# Altium PCB SiLPA_HE.PcbDoc (part 4 of 10)
Units mm, origin at the board's own origin, x right, y up, seen from the top; angles counter-clockwise.
Board outline 222.47 x 100.01 mm, 4 copper layers (Top Layer, Int1 (GND), Int2 (PWR), Bottom Layer), stack 1.508 mm thick; 661 components, 355 nets, 1925 pads, 1744 vias.
Unrouted connection lines stored in the file: 360.
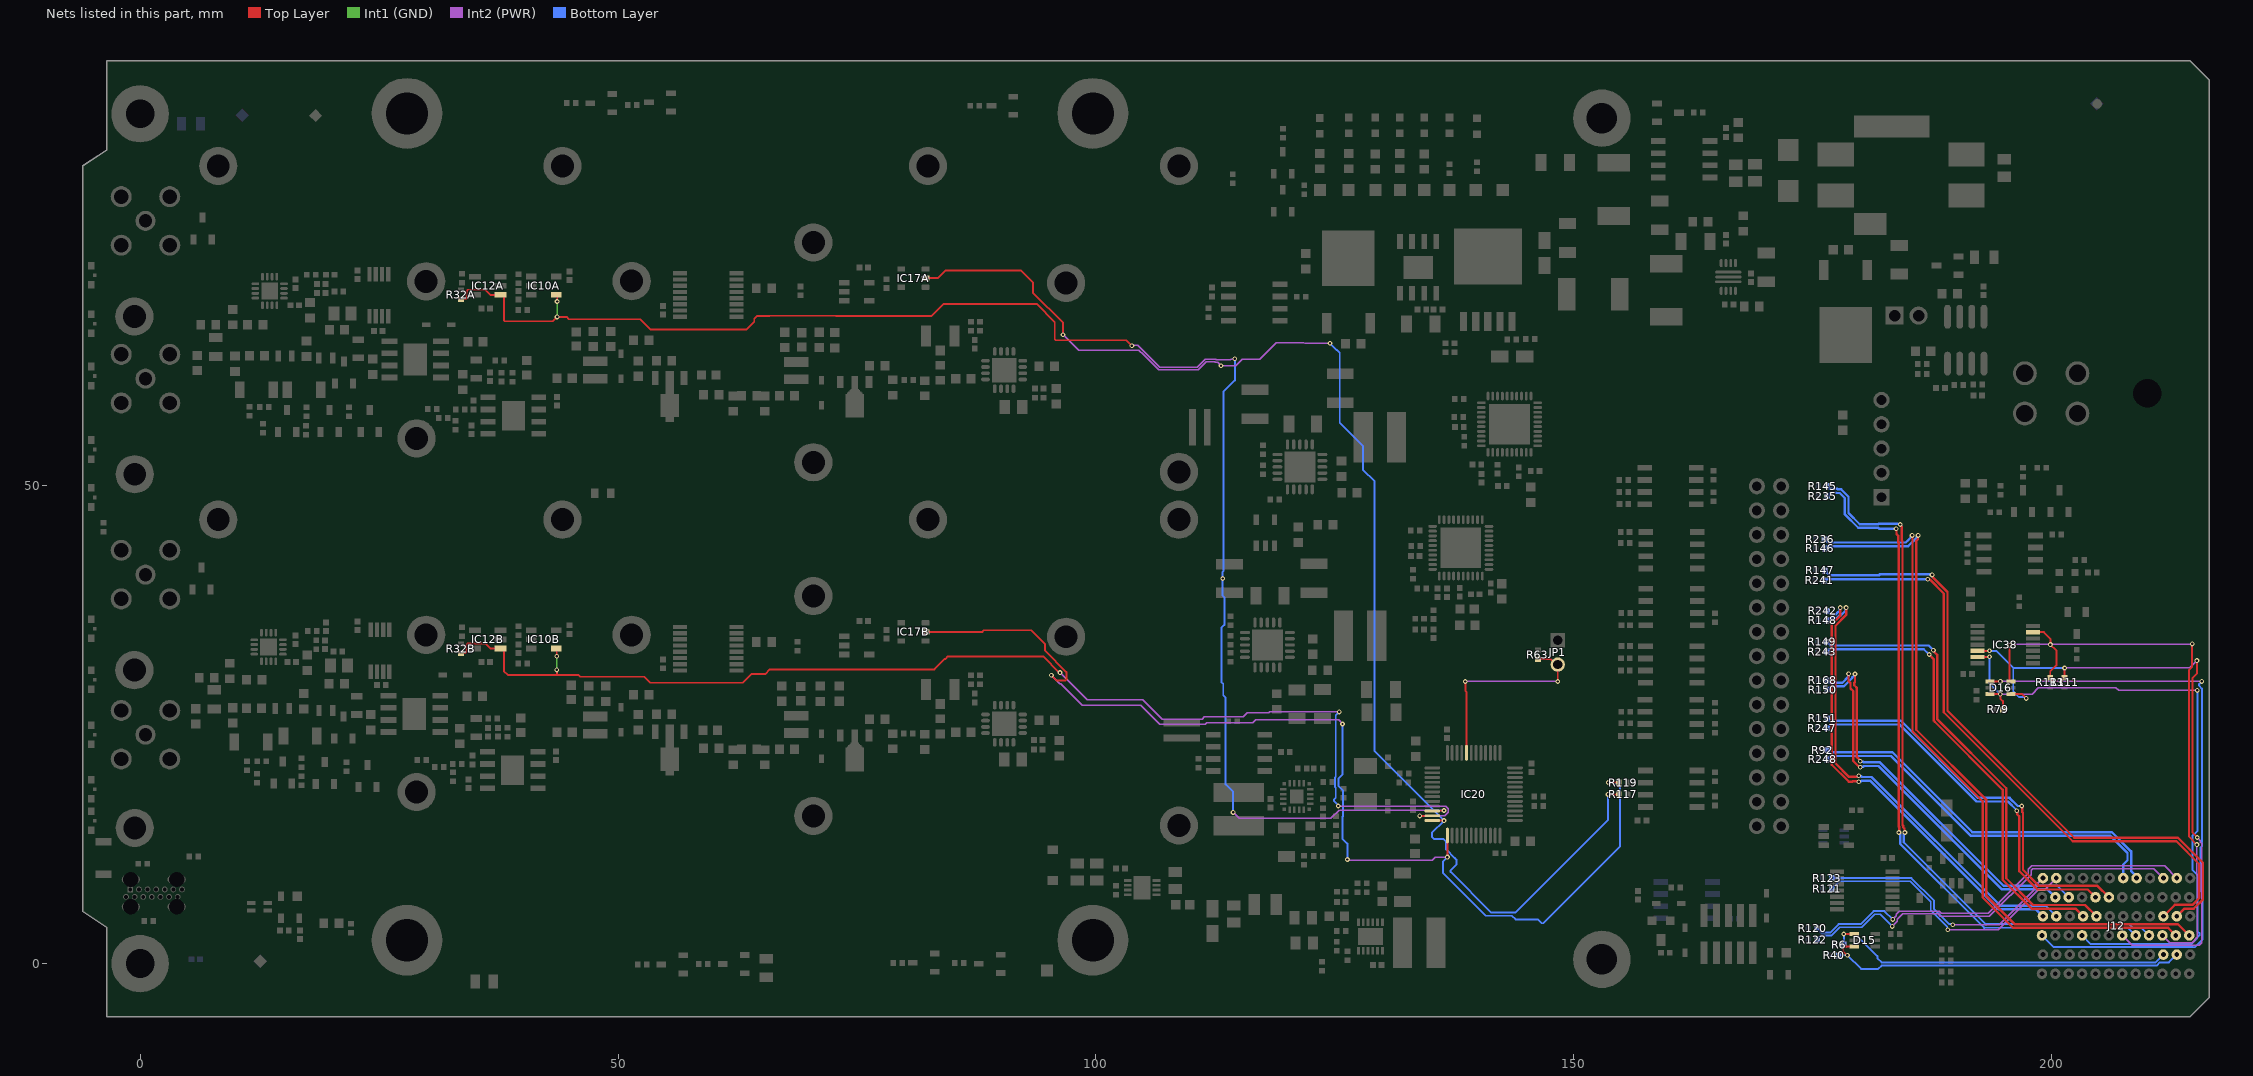
[diagram p5: the nets of this part, all layers, seen from the top]

## Part data (continued)
C18A C18B C20 C21 C22: library part CC0805_10UF_25V_10%_X5R, "Non-polarised capacitor", Case=0805, Manufacturer=GENERIC, Manufacturer1 ComponentHeight=0.95mm, Manufacturer1 Example=MURATA, Manufacturer1 Part Number=GRM219R61E106KA12D, Tolerance=±10%, Voltage=25V, Author="CERN DEM JLC", Component Type=Standard, CreateDate=25.10.2012, HelpURL=\\cern.ch\dfs\Applications\Altium\Datasheets\CC0805_X5R_MURATA_GRM.pdf, LatestRevisionDate=06.09.2016, Manufacturer Part Number=CC0805_10UF_25V_10%_X5R, Mounted=Yes, Part Description="SMD Multilayer Chip Ceramic Capacitor", Part Number=CC0805_10UF_25V_10%_X5R, Pin Count=2, Sense=No, SMD=Yes, Socket=No, Status=Preferred, TC=X5R
C23 C25 C26 C75 C76 C83 C85 C86 C99 C166: library part CC0402_1UF_16V_10%_X5R, "Non-polarised capacitor", Case=0402, Manufacturer=GENERIC, Manufacturer1 ComponentHeight=0.55mm, Manufacturer1 Example=TDK, Manufacturer1 Part Number=C1005X5R1C105KT, Tolerance=±10%, Voltage=16V, Author="CERN DEM JLC", Component Type=Standard, HelpURL=\\cern.ch\dfs\Applications\Altium\Datasheets\CC0402_X5R_TDK_C.pdf, Manufacturer Part Number=CC0402_1UF_16V_10%_X5R, Mounted=Yes, Part Description="SMD Multilayer Chip Ceramic Capacitor", Part Number=CC0402_1UF_16V_10%_X5R, Pin Count=2, Sense=No, SMD=Yes, Socket=No, Status=Preferred, TC=X5R
  C23 C25 C26 C75 C76 C83 C85 C86 C166: CreateDate=25.10.2012, LatestRevisionDate=25.10.2012
  C99: CreateDate=2012-10-25, LatestRevisionDate=2012-10-25
C27 C31 C129: library part CTE3216-18_10UF_16V_20%_AVX_TCJ, "Polarised capacitor", Case=A, Manufacturer=AVX, Manufacturer Part Number=TCJA106M016R0200, Tolerance=±20%, Voltage=16V, Author="CERN DEM JLC", Component Type=Standard, ComponentHeight=1.8mm, CreateDate=29.03.2012, HelpURL=\\cern.ch\dfs\Applications\Altium\Datasheets\CTE_AVX_TCJ.pdf, LatestRevisionDate=29.03.2012, Mounted=Yes, Part Description="ESR 0R200 Tantalum Solid Electrolytic Chip Capacitor with Conductive Polymer Electrode", Part Number=CTE3216-18_10UF_16V_20%_AVX_TCJ, Pin Count=2, Sense=No, SMD=Yes, Socket=No, Status=Preferred
C28 C30 C33 C35 C37 C38 C114 C123 C137 C138 C139 C140 C141: library part CC1206_22UF_35V_20%_JB_TDK_C3216JB1V226M160AC, "Non-polarised capacitor", Case=1206, Manufacturer=TDK, Manufacturer Part Number=C3216JB1V226M160AC, Tolerance=±20%, Voltage=35V, Author="CERN DEM JLC", Component Type=Standard, ComponentHeight=1.8mm, CreateDate=13.07.2017, HelpURL=\\cern.ch\dfs\Applications\Altium\Datasheets\CC1206_TDK_C3216JB1V226M160AC.pdf, LatestRevisionDate=13.07.2017, Mounted=Yes, Part Description="SMD Multilayer Chip Ceramic Capacitor", Part Number=CC1206_22UF_35V_20%_JB_TDK_C3216JB1V226M160AC, Pin Count=2, Sense=No, SMD=Yes, Socket=No, Status=None, TC=JB(±10%)
C39 C40 C102 C147: library part CC1210_10UF_50V_10%_X7R_YUDEN_UMK325AB7106KMHP, "Non-polarised capacitor", Case=1210, Manufacturer="TAIYO YUDEN", Manufacturer Part Number=UMK325AB7106KMHP, Tolerance=±10%, Voltage=50V, Author="CERN DEM JLC", Component Type=Standard, ComponentHeight=2.8mm, CreateDate=30.11.2016, HelpURL=\\cern.ch\dfs\Applications\Altium\Datasheets\CC1210_TAIYO-YUDEN_UMK325AB7106KMHP.pdf, LatestRevisionDate=30.12.2015, Mounted=Yes, Part Description="SMD Multilayer Chip Ceramic Capacitor (High Dielectric Type) for Automotive / Industrial Applications", Part Number=CC1210_10UF_50V_10%_X7R_YUDEN_UMK325AB7106KMHP, Pin Count=2, Sense=No, SMD=Yes, Socket=No, Status="Not Recommended", TC=X7R
C41A C41B: library part CC0603_470PF_50V_1%_NP0, "Non-polarised capacitor", Case=0603, Manufacturer=GENERIC, Manufacturer1 ComponentHeight=0.87mm, Manufacturer1 Example=Multicomp, Manufacturer1 Part Number=MCMT18N471F500CT, Tolerance=±1%, Voltage=50V, Author=GK, Component Type=Standard, CreateDate=03.12.2007, HelpURL=\\cern.ch\dfs\Applications\Altium\Datasheets\CC0603_NP0_PHYCOMP.pdf, LatestRevisionDate=03.12.2007, Manufacturer Part Number=CC0603_470PF_50V_1%_NP0, Mounted=Yes, Part Description="SMD Multilayer Chip Ceramic Capacitor", Part Number=CC0603_470PF_50V_1%_NP0, Pin Count=2, Sense=No, SMD=Yes, Socket=No, Status=Preferred, TC=C0G/NP0
C43A C43B C47A C47B C55A C55B C60A C60B C103 C120A C120B C121A C121B: library part CC0402_100NF_50V_10%_X7R, "Non-polarised capacitor", Case=0402, Manufacturer=GENERIC, Manufacturer1 ComponentHeight=0.55mm, Manufacturer1 Example=MURATA, Manufacturer1 Part Number=GRM155R71H104KE14D, Tolerance=±10%, Voltage=50V, Author="CERN DEM MR", Component Type=Standard, HelpURL=\\cern.ch\dfs\Applications\Altium\Datasheets\CC0402_MURATA_GRM155R71H104KE14D.pdf, Manufacturer Part Number=CC0402_100NF_50V_10%_X7R, Mounted=Yes, Part Description="SMD Multilayer Chip Ceramic Capacitor", Part Number=CC0402_100NF_50V_10%_X7R, Pin Count=2, Sense=No, SMD=Yes, Socket=No, Status=None, TC=X7R
  C43A C43B C47A C47B C55A C55B C60A C60B: CreateDate=30/06/2017, LatestRevisionDate=30/06/2017
  C103 C120A C120B C121A C121B: CreateDate=30.06.2017, LatestRevisionDate=30.06.2017
C45A C45B: library part CC0402_680PF_50V_5%_X7R, "Non-polarised capacitor", Case=0402, Manufacturer=GENERIC, Manufacturer1 ComponentHeight=0.55mm, Manufacturer1 Example=PHYCOMP, Manufacturer1 Part Number=223858715621, Manufacturer Part Number=CC0402_680PF_50V_10%_X7R, Tolerance=±10%, Voltage=50V, Author="CERN DEM JLC", Component Type=Standard, CreateDate=03.12.2007, HelpURL=\\cern.ch\dfs\Applications\Altium\Datasheets\CC0402_NP0_PHYCOMP.pdf, LatestRevisionDate=03.12.2007, Mounted=Yes, Part Description="SMD Multilayer Chip Ceramic Capacitor", Part Number=CC0402_680PF_50V_5%_X7R, Pin Count=2, Sense=No, SMD=Yes, Socket=No, Status="Not Recommended", TC=X7R
C48A C48B: library part CC0805_470NF_50V_10%_X7R, "Non-polarised capacitor", Case=0805, Manufacturer=GENERIC, Manufacturer1 ComponentHeight=1.1mm, Manufacturer1 Example=KEMET, Manufacturer1 Part Number=C0805C474K5RACTU, Tolerance=±10%, Voltage=50V, Author="CERN DEM JLC", Component Type=Standard, CreateDate=04.12.2013, HelpURL=\\cern.ch\dfs\Applications\Altium\Datasheets\CC0805_X7R_KEMET.pdf, LatestRevisionDate=04.12.2013, Manufacturer Part Number=CC0805_470NF_50V_10%_X7R, Mounted=Yes, Part Description="SMD Multilayer Chip Ceramic Capacitor", Part Number=CC0805_470NF_50V_10%_X7R, Pin Count=2, Sense=No, SMD=Yes, Socket=No, Status=Preferred, TC=X7R
C49A C49B: library part CC0603_3.3NF_50V_5%_C0G, "Non-polarised capacitor", Case=0603, Manufacturer=GENERIC, Manufacturer1 ComponentHeight=0.9mm, Manufacturer1 Example=TDK, Manufacturer1 Part Number=C1608C0G1H332J080AA, Tolerance=±5%, Voltage=50V, Author="CERN DEM MR", Component Type=Standard, CreateDate=02.11.2016, HelpURL=\\cern.ch\dfs\Applications\Altium\Datasheets\CC0603_C0G_TDK_C.pdf, LatestRevisionDate=02.11.2016, Manufacturer Part Number=CC0603_3.3NF_50V_5%_C0G, Mounted=Yes, Part Description="SMD Multilayer Chip Ceramic Capacitor", Part Number=CC0603_3.3NF_50V_5%_C0G, Pin Count=2, Sense=No, SMD=Yes, Socket=No, Status=Preferred, TC=C0G/NP0
C50A C50B: library part CC0603_270PF_50V_1%_NP0, "Non-polarised capacitor", Case=0603, Manufacturer=GENERIC, Manufacturer1 ComponentHeight=0.87mm, Manufacturer1 Example=Kemet, Manufacturer1 Part Number=C0603C271F5GACTU, Tolerance=±1%, Voltage=50V, Author=GK, Component Type=Standard, CreateDate=03.12.2007, HelpURL=\\cern.ch\dfs\Applications\Altium\Datasheets\CC0603_NP0_PHYCOMP.pdf, LatestRevisionDate=03.12.2007, Manufacturer Part Number=CC0603_270PF_50V_1%_NP0, Mounted=Yes, Part Description="SMD Multilayer Chip Ceramic Capacitor", Part Number=CC0603_270PF_50V_1%_NP0, Pin Count=2, Sense=No, SMD=Yes, Socket=No, Status=Preferred, TC=C0G/NP0
C53A C53B: library part CC0402_10NF_25V_10%_X7R, "Non-polarised capacitor", Case=0402, Manufacturer=GENERIC, Manufacturer1 ComponentHeight=0.55mm, Manufacturer1 Example=TDK, Manufacturer1 Part Number=C1005X7R1E103KT, Tolerance=±10%, Voltage=25V, Author="CERN DEM JLC", Component Type=Standard, CreateDate=25.10.2012, HelpURL=\\cern.ch\dfs\Applications\Altium\Datasheets\CC0402_X7R_TDK_C.pdf, LatestRevisionDate=25.10.2012, Manufacturer Part Number=CC0402_10NF_25V_10%_X7R, Mounted=Yes, Part Description="SMD Multilayer Chip Ceramic Capacitor", Part Number=CC0402_10NF_25V_10%_X7R, Pin Count=2, Sense=No, SMD=Yes, Socket=No, Status=Preferred, TC=X7R
C54A C54B C68 C87 C91 C101 C104: library part CC0603_1UF_25V_10%_X7R, "Non-polarised capacitor", Case=0603, Manufacturer=GENERIC, Manufacturer1 ComponentHeight=0.9mm, Manufacturer1 Example=MURATA, Manufacturer1 Part Number=GRM188R71E105KA12D, Tolerance=±10%, Voltage=25V, Author="CERN DEM JLC", Component Type=Standard, CreateDate=18.01.2011, HelpURL=\\cern.ch\dfs\Applications\Altium\Datasheets\CC0603_X7R_MURATA.pdf, LatestRevisionDate=18.01.2011, Manufacturer Part Number=CC0603_1UF_25V_10%_X7R, Mounted=Yes, Part Description="SMD Multilayer Chip Ceramic Capacitor", Part Number=CC0603_1UF_25V_10%_X7R, Pin Count=2, Sense=No, SMD=Yes, Socket=No, Status=None, TC=X7R
C69 C78 C82 C97 C98 C112 C113 C142: library part CC0603_1UF_16V_10%_X7R, "Non-polarised capacitor", Case=0603, Manufacturer=GENERIC, Manufacturer1 ComponentHeight=0.9mm, Manufacturer1 Example="YAGEO PHYCOMP", Manufacturer1 Part Number=223878615663, Manufacturer Part Number=CC0603_1uF_16V_10%_X7R, Tolerance=±10%, Voltage=16V, Author="CERN DEM JLC", Component Type=Standard, CreateDate=03.12.2007, HelpURL=\\cern.ch\dfs\Applications\Altium\Datasheets\CC0603_X7R_PHYCOMP.pdf, LatestRevisionDate=17.04.2015, Mounted=Yes, Part Description="SMD Multilayer Chip Ceramic Capacitor", Part Number=CC0603_1UF_16V_10%_X7R, Pin Count=2, Sense=No, SMD=Yes, Socket=No, Status=None, TC=X7R
C70: library part CC0603_1UF_25V_10%_X7R_1, "Non-polarised capacitor", Case=0603, Manufacturer=GENERIC, Manufacturer1 ComponentHeight=0.9mm, Manufacturer1 Example=MURATA, Manufacturer1 Part Number=GRM188R71E105KA12D, Manufacturer Part Number=CC0603_1UF_25V_10%_X7R, Tolerance=±10%, Voltage=25V, Author="CERN DEM JLC", Component Type=Standard, CreateDate=18.01.2011, HelpURL=\\cern.ch\dfs\Applications\Altium\Datasheets\CC0603_X7R_MURATA.pdf, LatestRevisionDate=18.01.2011, Mounted=Yes, Part Description="SMD Multilayer Chip Ceramic Capacitor", Part Number=CC0603_1UF_25V_10%_X7R, Pin Count=2, Sense=No, SMD=Yes, Socket=No, Status=None, TC=X7R
C72 C73: library part CC0402_12PF_50V_5%_C0G, "Non-polarised capacitor", Case=0402, Manufacturer=GENERIC, Manufacturer1 ComponentHeight=0.55mm, Manufacturer1 Example=KEMET, Manufacturer1 Part Number=C0402C120J5GACTU, Tolerance=±5%, Voltage=50V, Author="CERN DEM JLC", Component Type=Standard, CreateDate=04.10.2016, HelpURL="\\cern.ch\dfs\Applications\Altium\Datasheets\CC0805_C0G_KEMET_(Commercial Grade).pdf", LatestRevisionDate=04.10.2016, Manufacturer Part Number=CC0402_12PF_50V_5%_C0G, Mounted=Yes, Part Description="SMD Multilayer Chip Ceramic Capacitor", Part Number=CC0402_12PF_50V_5%_C0G, Pin Count=2, Sense=No, SMD=Yes, Socket=No, Status=Preferred, TC=C0G/NP0
C74: library part CC0402_100NF_16V_10%_X7R, "Non-polarised capacitor", Case=0402, Manufacturer=GENERIC, Manufacturer1 ComponentHeight=0.55mm, Manufacturer1 Example=MURATA, Manufacturer1 Part Number=GRM155R71C104KA88D, Tolerance=±10%, Voltage=16V, Author="CERN DEM JLC", Component Type=Standard, CreateDate=05.12.2013, HelpURL=\\cern.ch\dfs\Applications\Altium\Datasheets\CC0402_X7R_MURATA_GRM.pdf, LatestRevisionDate=03.12.2007, Manufacturer Part Number=CC0402_100NF_16V_10%_X7R, Mounted=Yes, Part Description="SMD Multilayer Chip Ceramic Capacitor", Part Number=CC0402_100NF_16V_10%_X7R, Pin Count=2, Sense=No, SMD=Yes, Socket=No, Status="Not Recommended", TC=X7R
C77: library part CTE3216-18_4.7UF_10V_10%_AVX_TPSA475K010T1400, "Polarised capacitor", Case=A, Manufacturer=AVX, Manufacturer Part Number=TPSA475K010T1400, Tolerance=±10%, Voltage=10V, Author="CERN DEM JLC", Component Type=Standard, ComponentHeight=1.8mm, CreateDate=23.01.2018, HelpURL=\\cern.ch\dfs\Applications\Altium\Datasheets\CTE-LESR_AVX_TPS-AUTO.pdf, LatestRevisionDate=23.01.2018, Mounted=Yes, Part Description="Low ESR 1R4 Automotive Solid Tantalum Chip Capacitor", Part Number=CTE3216-18_4.7UF_10V_10%_AVX_TPSA475K010T1400, Pin Count=2, Sense=No, SMD=Yes, Socket=No, Status=Preferred
C89 C154: library part CC0603_22UF_6.3V_20%_X5R, "Non-polarised capacitor", Case=0603, Manufacturer=GENERIC, Manufacturer1 ComponentHeight=0.9mm, Manufacturer1 Example=TDK, Manufacturer1 Part Number=C1608X5R0J226M080, Tolerance=±20%, Voltage=6.3V, Author="CERN DEM JLC", Component Type=Standard, CreateDate=16.12.2013, HelpURL=\\cern.ch\dfs\Applications\Altium\Datasheets\CC0603_X5R_TDK_C.pdf, LatestRevisionDate=03.12.2020, Manufacturer Part Number=CC0603_22UF_6.3V_20%_X5R, Mounted=Yes, Part Description="SMD Multilayer Chip Ceramic Capacitor", Part Number=CC0603_22UF_6.3V_20%_X5R, Pin Count=2, Sense=No, SMD=Yes, Socket=No, Status=None, TC=X5R
C117A C117B: library part CC0603_2.7PF_50V_0.25PF_NP0, "Non-polarised capacitor", Case=0603, Manufacturer=GENERIC, Manufacturer1 ComponentHeight=0.87mm, Manufacturer1 Example=PHYCOMP, Manufacturer1 Part Number=223886715278, Tolerance=±0.25pF, Voltage=50V, Author="CERN DEM JLC", Component Type=Standard, CreateDate=03.12.2007, HelpURL=\\cern.ch\dfs\Applications\Altium\Datasheets\CC0603_NP0_PHYCOMP.pdf, LatestRevisionDate=03.12.2007, Manufacturer Part Number=CC0603_2.7PF_50V_0.25PF_NP0, Mounted=Yes, Part Description="SMD Multilayer Chip Ceramic Capacitor", Part Number=CC0603_2.7PF_50V_0.25PF_NP0, Pin Count=2, Sense=No, SMD=Yes, Socket=No, Status=Preferred, TC=C0G/NP0
C118A C118B: library part CC0603_0.9PF_50V_0.05PF_NP0, "Non-polarised capacitor", Case=0603, Manufacturer=GENERIC, Manufacturer1 ComponentHeight=0.87mm, Manufacturer1 Example=AVX, Manufacturer1 Part Number=ML03510R9AAT2A, Tolerance=±0.05pF, Voltage=50V, Author=GK, Component Type=Standard, CreateDate=03.12.2007, HelpURL=\\cern.ch\dfs\Applications\Altium\Datasheets\CC0603_NP0_PHYCOMP.pdf, LatestRevisionDate=03.12.2007, Manufacturer Part Number=CC0603_0.9PF_50V_0.05PF_NP0, Mounted=Yes, Part Description="SMD Multilayer Chip Ceramic Capacitor", Part Number=CC0603_0.9PF_50V_0.05PF_NP0, Pin Count=2, Sense=No, SMD=Yes, Socket=No, Status=Preferred, TC=C0G/NP0
C124 C130: library part CC0603_2.2UF_16V_10%_X5R, "Non-polarised capacitor", Case=0603, Manufacturer=GENERIC, Manufacturer1 ComponentHeight=0.9mm, Manufacturer1 Example="YAGEO PHYCOMP", Manufacturer1 Part Number=CC0603KRX5R7BB225, Tolerance=±10%, Voltage=16V, Author="CERN DEM JLC", Component Type=Standard, CreateDate=28.04.2011, HelpURL=\\cern.ch\dfs\Applications\Altium\Datasheets\CC0805_X5R_PHYCOMP_HC.pdf, LatestRevisionDate=28.04.2011, Manufacturer Part Number=CC0603_2.2UF_16V_10%_X5R, Mounted=Yes, Part Description="SMD Multilayer Chip Ceramic Capacitor", Part Number=CC0603_2.2UF_16V_10%_X5R, Pin Count=2, Sense=No, SMD=Yes, Socket=No, Status=Preferred, TC=X5R
C125 C126 C127 C128 C135 C136: library part CC0805_22UF_16V_10%_X5R, "Non-polarised capacitor", Case=0805, Manufacturer=GENERIC, Manufacturer1 ComponentHeight=1.35mm, Manufacturer1 Example=TDK, Manufacturer1 Part Number=C2012X5R1C226KT, Tolerance=±10%, Voltage=16V, Author="CERN DEM JLC", Component Type=Standard, CreateDate=25.10.2012, HelpURL=\\cern.ch\dfs\Applications\Altium\Datasheets\CC0805_X5R_TDK_C.pdf, LatestRevisionDate=25.10.2012, Manufacturer Part Number=CC0805_22UF_16V_10%_X5R, Mounted=Yes, Part Description="SMD Multilayer Chip Ceramic Capacitor", Part Number=CC0805_22UF_16V_10%_X5R, Pin Count=2, Sense=No, SMD=Yes, Socket=No, Status=Preferred, TC=X5R
C131 C134: library part CC0402_1.5NF_50V_5%_C0G, "Non-polarised capacitor", Case=0402, Manufacturer=GENERIC, Manufacturer1 ComponentHeight=0.55mm, Manufacturer1 Example=KEMET, Manufacturer1 Part Number=C0402C152J5GACTU, Tolerance=±5%, Voltage=50V, Author="CERN DEM BC", Component Type=Standard, CreateDate=02.09.2019, HelpURL="\\cern.ch\dfs\Applications\Altium\Datasheets\CC0402_C0G_KEMET_(Commercial Grade).pdf", LatestRevisionDate=02.09.2019, Manufacturer Part Number=CC0402_1.5NF_50V_5%_C0G, Mounted=Yes, Part Description="SMD Multilayer Chip Ceramic Capacitor", Part Number=CC0402_1.5NF_50V_5%_C0G, Pin Count=2, Sense=No, SMD=Yes, Socket=No, Status=Preferred, TC=C0G/NP0
C132: library part CC0402_22PF_50V_5%_C0G, "Non-polarised capacitor", Case=0402, Manufacturer=GENERIC, Manufacturer1 ComponentHeight=0.55mm, Manufacturer1 Example=KEMET, Manufacturer1 Part Number=C0402C220J5GACTU, Tolerance=±5%, Voltage=50V, Author="CERN DEM JLC", Component Type=Standard, CreateDate=03.12.2007, HelpURL="\\cern.ch\dfs\Applications\Altium\Datasheets\CC0402_C0G_KEMET_(Commercial Grade).pdf", LatestRevisionDate=03.12.2007, Manufacturer Part Number=CC0402_22PF_50V_5%_C0G, Mounted=Yes, Part Description="SMD Multilayer Chip Ceramic Capacitor", Part Number=CC0402_22PF_50V_5%_C0G, Pin Count=2, Sense=No, SMD=Yes, Socket=No, Status=Preferred, TC=C0G/NP0
C144: library part CC0402_NO-VALUE, "Non-polarised capacitor", Case=0402, Manufacturer1 ComponentHeight=0.55mm, Author="CERN DEM JLC", Component Type=Standard, CreateDate=14.01.2014, HelpURL=Undefined, LatestRevisionDate=14.01.2014, Manufacturer=Undefined, Manufacturer Part Number=CC0402_NO-VALUE, Mounted=No, Part Description="Reserved Footprint For 0402(1005) Chip Ceramic Capacitor", Part Number=CC0402_NO-VALUE, Pin Count=2, Sense=No, SMD=Yes, Socket=No, Status=None
C145: library part CC0402_220PF_50V_1%_C0G, "Non-polarised capacitor", Case=0402, Manufacturer=GENERIC, Manufacturer1 ComponentHeight=0.55mm, Manufacturer1 Example=KEMET, Manufacturer1 Part Number=C0402C221F5GAC, Tolerance=±1%, Voltage=50V, Author="CERN DEM BC", Component Type=Standard, CreateDate=14.07.2020, HelpURL="\\cern.ch\dfs\Applications\Altium\Datasheets\CC0402_C0G_KEMET_(Commercial Grade).pdf", LatestRevisionDate=14.07.2020, Manufacturer Part Number=CC0402_220PF_50V_1%_C0G, Mounted=Yes, Part Description="SMD Multilayer Chip Ceramic Capacitor", Part Number=CC0402_220PF_50V_1%_C0G, Pin Count=2, Sense=No, SMD=Yes, Socket=No, Status=Preferred, TC=C0G/NP0
C146 C149: library part CC0603_1UF_16V_10%_X7R, "Non-polarised capacitor", Case=0603, Manufacturer=GENERIC, Manufacturer1 ComponentHeight=0.9mm, Manufacturer1 Example="YAGEO PHYCOMP", Manufacturer1 Part Number=223878615663, Tolerance=±10%, Voltage=16V, Author="CERN DEM JLC", Component Type=Standard, CreateDate=03.12.2007, HelpURL=\\cern.ch\dfs\Applications\Altium\Datasheets\CC0603_X7R_PHYCOMP.pdf, LatestRevisionDate=17.04.2015, Manufacturer Part Number=CC0603_1UF_16V_10%_X7R, Mounted=Yes, Part Description="SMD Multilayer Chip Ceramic Capacitor", Part Number=CC0603_1UF_16V_10%_X7R, Pin Count=2, Sense=No, SMD=Yes, Socket=No, Status=None, TC=X7R
D1 D7: "Schottky Diode", Case=SOD-523F, Manufacturer=COMCHIP, Power=500mA, Voltage=20V, Author="CERN DEM HF", Bonding=No, Component Type=Standard, ComponentHeight=1mm, CreateDate=13.10.2023, Device=CDBU0520-HF, HelpURL=\\cern.ch\dfs\Applications\Altium\Datasheets\CDBU0520-HF.pdf, LatestRevisionDate=13.10.2023, Manufacturer Part Number=CDBU0520-HF, Mounted=Yes, PackageDescription="Small Outline Diode Flat Lead (SOD-523F), Body; 1.80mm L X 1mm W X 0.85mm H", Part Description="20V Surface mount Schottky Barrier Diode", Part Number=CDBU0520-HF, Pin Count=2, PressFit=No, Sense=No, SMD=Yes, Socket=No
D1A D1B D11A D11B: library part D_TVS_SZNUP1301ML3T1G, "Low Capacitance Diode Array for ESD Protection in a Single Data Line", Case=SOT23, Manufacturer=ONSEMI, Power=215mA, Voltage=70V, Author=GK, Bonding=No, Component Type=Standard, ComponentHeight=1.1mm, CreateDate=18.01.2010, Device=SZNUP1301ML3T1G, HelpURL=\\cern.ch\dfs\Applications\Altium\Datasheets\BAR66.pdf, LatestRevisionDate=05.10.2010, Manufacturer Part Number=SZNUP1301ML3T1G, Mounted=Yes, PackageDescription="SOT23 3-Leads, Pitch 0.95mm - Body 1.3x2.9mm, IPC Medium Density", Part Description="Low Capacitance Diode Array for ESD Protection in a Single Data Line", Part Number=SZNUP1301ML3T1G, Pin Count=3, PressFit=No, Sense=No, SMD=Yes, Socket=No
D2A D2B D3A D3B: library part D_TVS_AQ4021-01FTG-C, "6V Bi-directional,ESD Protection for Transient Voltage Suppressor Diode", Case=SOD323, Manufacturer=Littlefuse, Power=450W, Voltage=6V, Author=GK, Bonding=No, Component Type=Standard, ComponentHeight=1.14mm, CreateDate=22.07.2015, Device=AQ4021-01FTG-C, HelpURL=\\cern.ch\dfs\Applications\Altium\Datasheets\CDSOD323-T12C-DSL.pdf, LatestRevisionDate=19.12.2017, Manufacturer Part Number=AQ4021-01FTG-C, Mounted=Yes, PackageDescription="SOD-323 Diode; 1.75mm W X 1.30mm L X 1.14mm H Body, IPC Medium Density", Part Description="Bi-directional ESD Protection for Transient Voltage Suppressor Diode", Part Number=AQ4021-01FTG-C, Pin Count=2, PressFit=No, Sense=No, SMD=Yes, Socket=No
D4: "Zener Diode", Case=DO-214AA, Manufacturer="FAIRCHILD SEMICONDUCTOR", Power=600W, Voltage=12V, Author="CERN DEM JLC", Bonding=No, Component Type=Standard, ComponentHeight=2.65mm, CreateDate=10.04.2013, Device=SMBJ12A, HelpURL=\\cern.ch\dfs\Applications\Altium\Datasheets\SMBJ.pdf, LatestRevisionDate=10.04.2013, Manufacturer Part Number=SMBJ12A, Mounted=Yes, PackageDescription="DO-214-AA/SMB Diode, Molded Body; 5.34mm L X 3.625mm W X 2.65mm H, IPC Medium Density", Part Description="Uni-Directional Transient Voltage Suppressor Diode", Part Number=SMBJ12A, Pin Count=2, PressFit=No, Sense=No, SMD=Yes, Socket=No
D5 D15 D16: "Fivefold ESD Protection Diode Arrays", Case=SOT363, Manufacturer=NEXPERIA, Power=200W, Voltage=3.3V, Author="CERN DEM WB", Bonding=No, Component Type=Standard, ComponentHeight=1.1mm, CreateDate=05.07.2021, Device=PESD3V3L5UY, HelpURL=\\cern.ch\dfs\Applications\Altium\Datasheets\PESD3V3L5UY.pdf, LatestRevisionDate=05.07.2021, Manufacturer Part Number=PESD3V3L5UY, Mounted=Yes, PackageDescription="SOT363, SC-88, 0.65mm Pitch; 6 Pin, 1.25mm W X 2.00mm L X 1.10mm H body, IPC Medium Density", Part Description="Fivefold ESD Protection Diode Arrays (30kV)", Part Number=PESD3V3L5UY, Pin Count=6, PressFit=No, Sense=No, SMD=Yes, Socket=No
D8A D8B: library part D_TVS_AQ4020-01FTG, "4V Transient Voltage Suppressor Diode (Uni-Directional)", Case=SOD323, Manufacturer=Littlefuse, Power=735W, Voltage=4V, Author=GK, Bonding=No, Component Type=Standard, ComponentHeight=1.1mm, CreateDate=28.08.2012, Device=AQ4020-01FTG, HelpURL=\\cern.ch\dfs\Applications\Altium\Datasheets\PESD5V0S1UA.pdf, LatestRevisionDate=18.09.2013, Manufacturer Part Number=AQ4020-01FTG, Mounted=Yes, PackageDescription="Small Outline Diode (SOD-323), 1.70mm W X 1.25mm L X 1.10mm H body,  IPC Medium Density", Part Description="Unidirectional ESD Protection for Transient Voltage Suppression", Part Number=AQ4020-01FTG, Pin Count=2, PressFit=No, Sense=No, SMD=Yes, Socket=No
D9 D13: "Ultra Low Capacitance Double Rail-to-Rail ESD Protection Diode", Case=SOT143B, Manufacturer="NXP SEMICONDUCTORS", Voltage=5.5V, Author="CERN DEM JLC", Bonding=No, Component Type=Standard, ComponentHeight=1.1mm, CreateDate=22.03.2011, Device=PRTR5V0U2X, HelpURL=\\cern.ch\dfs\Applications\Altium\Datasheets\PRTR5V0U2X.pdf, LatestRevisionDate=22.03.2011, Manufacturer Part Number=PRTR5V0U2X, Mounted=Yes, PackageDescription="SOT143B, SOT, 1.90mm Pitch; 4 Pin, 1.30mm W X 2.90mm L X 1.10mm H body, IPC Medium Density", Part Description="Ultra Low Capacitance (1pF) Double Rail-to-Rail ESD Protection Diode (8kV)", Part Number=PRTR5V0U2X, Pin Count=4, PressFit=No, Sense=No, SMD=Yes, Socket=No
D10 D12 D17: "Schottky Diode", Case=SOD323, Manufacturer=INFINEON, Power=750mA, Voltage=40V, Author="CERN DEM JLC", Bonding=No, Component Type=Standard, ComponentHeight=1.1mm, CreateDate=12.11.2014, Device=BAT165, HelpURL=\\cern.ch\dfs\Applications\Altium\Datasheets\BAT165.pdf, LatestRevisionDate=12.11.2014, Manufacturer Part Number=BAT165, Mounted=Yes, Part Description="Medium Power AF Schottky Diode", Part Number=BAT165, Pin Count=2, PressFit=No, Sense=No, SMD=Yes, Socket=No
  D10 D17: PackageDescription="Small Outline Diode Flat Lead (SOD-323), 1.70mm W X 1.25mm L X 1.10mm H body,  IPC Medium Density"
  D12: PackageDescription="Small Outline Diode (SOD-323), 1.70mm W X 1.25mm L X 1.10mm H body,  IPC Medium Density"
D14A D14B D18A D18B: "Zener Diode", Case=SOD-80C, Manufacturer=NEXPERIA, Power=500mW, Voltage=33V, Author="CERN DEM JLC", Bonding=No, Component Type=Standard, ComponentHeight=1.6mm, CreateDate=25.07.2012, Device=BZV55-B33, HelpURL=\\cern.ch\dfs\Applications\Altium\Datasheets\BZV55.pdf, LatestRevisionDate=22.01.2018, Manufacturer Part Number=BZV55-B33, Mounted=Yes, PackageDescription="SOD80C, MELF Diode, 2-Leads, Body 3.5x1.5mm, IPC Medium Density", Part Description="Voltage Regulator Diode", Part Number=BZV55-B33, Pin Count=2, PressFit=No, Sense=No, SMD=Yes, Socket=No
D19: "Schottky Diode", Case=SOD123, Manufacturer="NXP SEMICONDUCTORS", Power=2A, Voltage=60V, Author="CERN DEM JMW", Bonding=No, Component Type=Standard, ComponentHeight=0.65mm, CreateDate=19.06.2014, Device=PMEG6020ER, HelpURL=\\cern.ch\dfs\Applications\Altium\Datasheets\PMEG6020ER.pdf, LatestRevisionDate=19.06.2014, Manufacturer Part Number=PMEG6020ER, Mounted=Yes, PackageDescription="SODFL Diode (SOD123W); 2.60mm W X 1.70mm L X 1.10mm H body, IPC Medium Density", Part Description="MEGA Schottky Barrier Rectifier", Part Number=PMEG6020ER, Pin Count=2, PressFit=No, Sense=No, SMD=Yes, Socket=No
FB1 FB2A FB2B FB4: library part IND0402_MURATA_BLM15HB221SN1, Case=0402, Manufacturer=MURATA, Manufacturer Part Number=BLM15HB221SN1, Power=250mA, Resistance=1R, Tolerance=±25%, Author="CERN DEM JLC", Component Type=Standard, ComponentHeight=0.55mm, CreateDate=23.06.2009, HelpURL=\\cern.ch\dfs\Applications\Altium\Datasheets\IND0402_MURATA_BLM15H.pdf, LatestRevisionDate=25.10.2018, Mounted=Yes, Part Description="SMD EMIFIL Suppression Chip Ferrite Bead", Part Number=IND0402_MURATA_BLM15HB221SN1, Pin Count=2, Sense=No, SMD=Yes, Socket=No, Status=None
FL1: library part FIL_MURATA_BNX022-01L, "Block Type EMIFIL (LC Combined)", Manufacturer=MURATA, Manufacturer Part Number=BNX022-01L, Resistance=0.5R, Author="CERN DEM JLC", Component Type=Standard, ComponentHeight=3.3mm, CreateDate=10.10.2012, HelpURL=\\cern.ch\dfs\Applications\Altium\Datasheets\FIL_MURATA_BNX022-01L.pdf, LatestRevisionDate=10.10.2012, Mounted=Yes, Part Description="Block Type EMIFIL (LC Combined) SMD Type, BNX02* Series", Part Number=FIL_MURATA_BNX022-01L, Pin Count=2, Sense=No, SMD=Yes, Socket=No, Status=None
FTG1: library part FIDUCIAL_TARGET_C100-200, "Fiducial Target", Author="CERN DEM JLC", Component Type="Standard (No BOM)", ComponentHeight=0mm, CreateDate=09.02.2010, Family=Fiducial, HelpURL=Undefined, LatestRevisionDate=04.04.2012, Mounted=No, PackageDescription="Round Fiducial Target, Top Layer, 1.0mm, Top Solder 2.0mm, Keepout =2.0mm", Part Description="Round Fiducial Target, Top Layer, 1.0mm, Top Solder 2.0mm, Keepout =2.0mm", Part Number=FIDUCIAL_TARGET_C100-200, Pin Count=1, Sense=No, SMD=Yes, Socket=No, Status=None
FTG2 FTG3 FTG4 FTG5 FTG6: library part FIDUCIAL_TARGET_S100-200, "Fiducial Target", Author="CERN DEM JLC", Component Type="Standard (No BOM)", ComponentHeight=0mm, CreateDate=09.02.2010, Family=Fiducial, HelpURL=Undefined, LatestRevisionDate=04.04.2012, Mounted=No, PackageDescription="Square Fiducial Target, Top Layer, 1.0mm, Top Solder 2.0mm, Keepout =2.0mm", Part Description="Square Fiducial Target, Top Layer, 1.0mm, Top Solder 2.0mm, Keepout =2.0mm", Part Number=FIDUCIAL_TARGET_S100-200, Pin Count=1, Sense=No, SMD=Yes, Socket=No, Status=None
IC1A IC1B: "DC-4GHz High Isolation SPDT Non-Reflective Switch", Case=QFN16, Manufacturer="ANALOG DEVICES", Author="CERN DEM JLC", Bonding=No, Component Type=Standard, ComponentHeight=1mm, CreateDate=23.02.2017, Device=HMC349ALP4CE, HelpURL=\\cern.ch\dfs\Applications\Altium\Datasheets\HMC349ALP4CE.pdf, LatestRevisionDate=23.02.2017, Manufacturer Part Number=HMC349ALP4CE, Mounted=Yes, PackageDescription="QFN, 0.65mm pitch,square; 4 pin X 4 pin, 4mm X 4mm X 1mm H body (w/thermal tab 2.55 X 2.55mm),  IPC Medium Density", Part Description="DC-4GHz High Isolation SPDT Non-Reflective Switch", Part Number=HMC349ALP4CE, Pin Count=17, PressFit=No, Sense=No, SMD=Yes, Socket=No
IC2A IC2B: "20MHz to 1GHz IF Gain Block", Case=SOT89, Manufacturer="ANALOG DEVICES", Author="CERN DEM BC", Bonding=No, Component Type=Standard, ComponentHeight=1.6mm, CreateDate=19.08.2019, Device=ADL5536ARKZ, HelpURL=\\cern.ch\dfs\Applications\Altium\Datasheets\ADL5536ARKZ.pdf, LatestRevisionDate=19.08.2019, Manufacturer Part Number=ADL5536ARKZ, Mounted=Yes, PackageDescription="SOT89, 1.50mm Pitch; 3-Leads, 2.5mm W X 4.5mm L X 1.6mm H body", Part Description="20MHz to 1GHz IF Gain Block", Part Number=ADL5536ARKZ, Pin Count=4, PressFit=No, Sense=No, SMD=Yes, Socket=No
IC3A IC3B: "Monolithic Amplifier", Manufacturer=MINI-CIRCUITS, Author="CERN DEM BC", Bonding=No, Component Type=Standard, ComponentHeight=1.6mm, CreateDate=22.08.2019, Device=PHA-1+, HelpURL=\\cern.ch\dfs\Applications\Altium\Datasheets\PHA-1+.pdf, LatestRevisionDate=22.08.2019, Manufacturer Part Number=PHA-1+, Mounted=Yes, PackageDescription="MINI-CIRCUITS DF782 Case, 1.50mm pitch; 4 pin, 2.44mm W X 4.49mm L", Part Description="0.05-6GHz Surface Mount Monolithic Amplifier", Part Number=PHA-1+, Pin Count=4, PressFit=No, Sense=No, SMD=Yes, Socket=No
IC4 IC14: library part IFC_FIN1027A, "3.3V LVDS, 2-Bit, High-Speed, Differential Driver", Case=SOIC8, Manufacturer="ON Semiconductor", Author=GK, Bonding=No, Component Type=Standard, ComponentHeight=0.8mm, CreateDate=08/11/2016, Device=FIN1027AMX, HelpURL=\\cern.ch\dfs\Applications\Altium\Datasheets\FIN1101K8X.pdf, LatestRevisionDate=08/11/2016, Manufacturer Part Number=FIN1027AMX, Mounted=Yes, PackageDescription="SOIC 8, Pitch 1.27mm - Body 4x5mm, IPC Medium Density", Part Description="3.3V LVDS, 2-Bit, High-Speed, Differential Driver", Part Number=FIN1027AMX, Pin Count=8, PressFit=No, Sense=No, SMD=Yes, Socket=No
IC5: "3V-17V 2A Step-Down Converter, High Accuracy, With DCS-Control", Case=QFN14, Manufacturer="TEXAS INSTRUMENTS", Author="CERN DEM MR", Bonding=No, Component Type=Standard, ComponentHeight=1mm, CreateDate=08.02.2019, Device=TPS62148RGX, HelpURL=\\cern.ch\dfs\Applications\Altium\Datasheets\TPS62148RGX.pdf, LatestRevisionDate=08.02.2019, Manufacturer Part Number=TPS62148RGX, Mounted=Yes, PackageDescription="TEXAS Case Style (R-VQFN-HR-N11), 0.50mm Pitch, 11-pin, 2.00mm W X 3.00mm L X 1.00mm H Body", Part Description="3V-17V 2A Step-Down Converter, High Accuracy, With DCS-Control", Part Number=TPS62148RGX, Pin Count=11, PressFit=No, Sense=No, SMD=Yes, Socket=No
IC6 IC13 IC15 IC21: library part IFC_FIN1028, "3.3V LVDS 2-Bit High-Speed Differential Reciever", Case=SOIC8, Manufacturer="ON Semiconductor", Author=GK, Bonding=No, Component Type=Standard, ComponentHeight=0.8mm, CreateDate=08/11/2016, Device=FIN1028MX, HelpURL=\\cern.ch\dfs\Applications\Altium\Datasheets\FIN1101K8X.pdf, LatestRevisionDate=08/11/2016, Manufacturer Part Number=FIN1028MX, Mounted=Yes, PackageDescription="SOIC 8, Pitch 1.27mm - Body 4x5mm, IPC Medium Density", Part Description="3.3V LVDS 2-Bit High-Speed Differential Reciever", Part Number=FIN1028MX, Pin Count=8, PressFit=No, Sense=No, SMD=Yes, Socket=No
IC7A IC7B: "GaN Wideband Transistor 28V, 5W, DC - 6GHz", Case=SOIC8, Manufacturer=MACOM, Author="CERN DEM BC", Bonding=No, Component Type=Standard, ComponentHeight=1.67mm, CreateDate=23.08.2019, Device=NPTB00004A, HelpURL=\\cern.ch\dfs\Applications\Altium\Datasheets\NPTB00004A.pdf, LatestRevisionDate=23.08.2019, Manufacturer Part Number=NPTB00004A, Mounted=Yes, PackageDescription="SOIC, 1.27mm pitch; 8 pin, 3.89mm W X 4.90mm L X 1.67mm H body (w/thermal tab 2.45mm X 3.35mm), IPC Medium Density", Part Description="GaN Wideband Transistor 28V, 5W, DC - 6GHz", Part Number=NPTB00004A, Pin Count=9, PressFit=No, Sense=No, SMD=Yes, Socket=No
IC8: "Adjustable, 3A, Fast Response LDO Regulator", Case=TO-252-5, Manufacturer="MICROCHIP TECHNOLOGY", Author="CERN DEM BC", Bonding=No, Component Type=Standard, ComponentHeight=2.39mm, CreateDate=17.05.2021, Device=MIC29302AWD, HelpURL=\\cern.ch\dfs\Applications\Altium\Datasheets\MIC29302AWD.pdf, LatestRevisionDate=17.05.2021, Manufacturer Part Number=MIC29302AWD, Mounted=Yes, PackageDescription="TO-252 DPAK TO, 1.27mm Pitch; 5 Pin, 10.3mm L X 8.781mm W X 2.39mm H body", Part Description="Adjustable, 3A, Fast Response LDO Regulator", Part Number=MIC29302AWD, Pin Count=6, PressFit=No, Sense=No, SMD=Yes, Socket=No
IC9A IC9B: "DC to 6 GHz, 45 dB TruPwr Detector With Envelope Threshold Detection", Case=QFN16, Manufacturer="ANALOG DEVICES", Author="CERN DEM MR", Bonding=No, Component Type=Standard, ComponentHeight=0.8mm, CreateDate=26.09.2017, Device=ADL5904ACPZN-R7, HelpURL=\\cern.ch\dfs\Applications\Altium\Datasheets\ADL5904ACPZN-R7.pdf, LatestRevisionDate=26.09.2017, Manufacturer Part Number=ADL5904ACPZN-R7, Mounted=Yes, PackageDescription="QFN, 0.50mm Pitch, Square; 16 Pin, 3.00mm L X 3.00mm W X 0.80mm H Body (w/Thermal Tab 1.75 X 1.75mm),  IPC Medium Density", Part Description="DC to 6 GHz, 45 dB TruPwr Detector With Envelope Threshold Detection", Part Number=ADL5904ACPZN-R7, Pin Count=17, PressFit=No, Sense=No, SMD=Yes, Socket=No
IC10A IC10B: "Rail-to-Rail, Very Fast, 2.5 V to 5.5 V Single-Supply TTL/CMOS Comparator", Case=SOT23-5, Manufacturer="ANALOG DEVICES", Author="CERN DEM JLC", Bonding=No, Component Type=Standard, ComponentHeight=1.45mm, CreateDate=25/04/2012, Device=ADCMP600BRJZ-R2, HelpURL=\\cern.ch\dfs\Applications\Altium\Datasheets\ADCMP600BRJZ-R2.pdf, LatestRevisionDate=25/04/2012, Manufacturer Part Number=ADCMP600BRJZ-R2, Mounted=Yes, PackageDescription="SOT, 0.95mm pitch; 5 pin, 1.60mm W X 2.90mm L X 1.45mm H body, IPC Medium Density", Part Description="Rail-to-Rail, Very Fast, 2.5 V to 5.5 V Single-Supply TTL/CMOS Comparator", Part Number=ADCMP600BRJZ-R2, Pin Count=5, PressFit=No, Sense=No, SMD=Yes, Socket=No
IC11A IC11B: library part 74LVC112APWR, "Dual Negative-Edge-Triggered J-K Flip-Flop With Clear And Preset", Case=TSSOP16, Manufacturer="TEXAS INSTRUMENTS", Author="CERN DEM JLC", Bonding=No, Component Type=Standard, ComponentHeight=1.75mm, CreateDate=06.08.2012, Device=SN74LVC112APWR, HelpURL=\\cern.ch\dfs\Applications\Altium\Datasheets\SN74LS112AD.pdf, LatestRevisionDate=06.08.2012, Manufacturer Part Number=SN74LVC112APWR, Mounted=Yes, PackageDescription="SOP, 0.65mm Pitch; 16 Pin, 4.40mm W X 5.00mm L X 1.20mm H Body, IPC Medium Density", Part Description="Dual Negative-Edge-Triggered J-K Flip-Flops With Clear and Preset", Part Number=SN74LVC112APWR, Pin Count=16, PressFit=No, Sense=No, SMD=Yes, Socket=No
IC12A IC12B: "Operational Amplifier", Case=SOT23-5, Manufacturer="MICROCHIP TECHNOLOGY", Author="CERN DEM BC", Bonding=No, Component Type=Standard, ComponentHeight=1.45mm, CreateDate=22.08.2019, Device=MCP6291T-E/OT, HelpURL=\\cern.ch\dfs\Applications\Altium\Datasheets\MCP6291T-E-OT.pdf, LatestRevisionDate=22.08.2019, Manufacturer Part Number=MCP6291T-E/OT, Mounted=Yes, PackageDescription="SOT, 0.95mm pitch; 5 pin, 1.55mm W X 2.90mm L X 1.45mm H body, IPC Medium Density", Part Description="1.0mA, 10 MHz Rail-to-Rail Operational Amplifier", Part Number=MCP6291T-E/OT, Pin Count=5, PressFit=No, Sense=No, SMD=Yes, Socket=No
IC16: "1.7V-5.5V, 2K I2C Serial EEPROM With EUI-48 Node Identity", Case=SOT23-5, Manufacturer="MICROCHIP TECHNOLOGY", Author="CERN DEM MR", Bonding=No, Component Type=Standard, ComponentHeight=1.45mm, CreateDate=31.03.2016, Device=24AA02E48T-I/OT, HelpURL=\\cern.ch\dfs\Applications\Altium\Datasheets\24AA02E48T-I-OT.pdf, LatestRevisionDate=31.03.2016, Manufacturer Part Number=24AA02E48T-I/OT, Mounted=Yes, PackageDescription="SOT, 0.95mm pitch; 5 pin, 1.60mm W X 2.90mm L X 1.45mm H body, IPC Medium Density", Part Description="1.7V-5.5V, 2K I2C Serial EEPROM With EUI-48 Node Identity", Part Number=24AA02E48T-I/OT, Pin Count=5, PressFit=No, Sense=No, SMD=Yes, Socket=No
IC17A IC17B: library part CMP-0859-00053-3, "Single 2-Input Positive-AND Gate, DBV0005A, LARGE T&R", F @ Nom Voltage(Max)(Mhz)=150, Generic Part Number=SN74LVC1G08, ICC @ Nom Voltage(Max)(mA)=0.01, Manufacturer="Texas Instruments", Operating Temperature Range(C)="-40 to 125,-40 to 85", Rating=Catalog, tpd @ Nom Voltage(Max)(ns)=4.5,6,4,5, Voltage(Nom)(V)=1.8,2.5,3.3,5, 3-State Output=No, Bits(#)=1, DatasheetVersion=SCES217Y, Gate Type=AND, Input Type=CMOS/TTL, Logic=True, Output Drive (IOL/IOH)(Max)(mA)=32/-32, Output Type=CMOS, PackageReference=DBV0005A, Schmitt Trigger=No, Sub-Family="AND Gate", Technology Family=LVC, VCC(Max)(V)=5.5, VCC(Min)(V)=1.65
IC18 IC29: "80V, Bi-Directional, Low-/High-Side, Voltage Output Current Sense Amplifier", Case=SOIC8, Manufacturer="TEXAS INSTRUMENTS", Author="CERN DEM JLC", Bonding=No, Component Type=Standard, ComponentHeight=1.75mm, CreateDate=27.09.2018, Device=INA286AQDRQ1, HelpURL=\\cern.ch\dfs\Applications\Altium\Datasheets\INA286AQDRQ1.pdf, LatestRevisionDate=27.09.2018, Manufacturer Part Number=INA286AQDRQ1, Mounted=Yes, PackageDescription="SOIC 8, Pitch 1.27mm, Body 4x5mm, IPC Medium Density", Part Description="80V, Bi-Directional, Low-/High-Side, Voltage Output Current Sense Amplifier (Automotive Grade)", Part Number=INA286AQDRQ1, Pin Count=8, PressFit=No, Sense=No, SMD=Yes, Socket=No
IC19: "2.5V Micropower, Low Noise Precision Voltage References with Shutdown", Case=SOT23-5, Manufacturer="ANALOG DEVICES", Manufacturer Part Number=ADR391AUJ, Author="CERN DEM JLC", Bonding=No, Component Type=Standard, ComponentHeight=1.0mm, CreateDate=21.03.2019, Device=ADR391AUJZ, HelpURL=\\cern.ch\dfs\Applications\Altium\Datasheets\ADR391AUJZ.pdf, LatestRevisionDate=04.04.2022, Mounted=Yes, PackageDescription="SOT23, 0.95mm Pitch; 5 Pin, 1.75mm W X 3.00mm L X 1.00mm H body, IPC Medium Density", Part Description="2.5V Micropower, Low Noise Precision Voltage References with Shutdown", Part Number=ADR391AUJZ, Pin Count=5, PressFit=No, Sense=No, SMD=Yes, Socket=No
IC20: library part CMP-0304-00170-4, "ARM Cortex-M0 32-bit MCU, 128 KB Flash, 16 KB Internal RAM, 37 I/Os, 48-Pin LQFP, -40 to 85 degC, Tray", I/Os (High Current)=37, Manufacturer=STMicroelectronics, Operating Frequency(F) (Processor speed) (MHz)=48, Package Description="48-Pin Low Profile Quad Flat Package, Body 7 x 7 mm, Pitch 0.5 mm", Package Reference=LQFP48, Supply Voltage(Vcc) min (V)=2, ComponentLink1Description="Manufacturer URL", ComponentLink1URL=http://www.st.com/, ComponentLink2Description=Datasheet, ComponentLink2URL=http://www.st.com/st-web-ui/static/active/en/resource/technical/document/datasheet/DM00090510.pdf, Core="ARM Cortex-M0", D/A Converter=1, DatasheetVersion="Rev. 5", FLASH Size (Prog) (kB)=128, Internal RAM Size (kB)=16, Mounting Technology="Surface Mount", Packing=Tray, PartNumber=STM32F072CBT6
IC22A IC22B: "Dual Operational Amplifier With Exposed Pad", Case=SOIC8, Manufacturer="ANALOG DEVICES", Author="CERN DEM JLC", Bonding=No, Component Type=Standard, ComponentHeight=1.75mm, CreateDate=31.05.2011, Device=AD8397ARDZ, HelpURL=\\cern.ch\dfs\Applications\Altium\Datasheets\AD8397ARDZ.pdf, LatestRevisionDate=31.05.2011, Manufacturer Part Number=AD8397ARDZ, Mounted=Yes, PackageDescription="SOIC 8, Pitch 1.27mm - Body 3.9x4.9mm, (w/thermal tab 2.41mm X 3.098mm), IPC Medium Density", Part Description="Rail-to-Rail, High Output Current Amplifier", Part Number=AD8397ARDZ, Pin Count=9, PressFit=No, Sense=No, SMD=Yes, Socket=No
IC23: library part VMON_STM809, "2.93V  Reset circuit"
IC24A IC24B: "Single 2-Input Positive-OR Gate", Case=SOT23-5, Manufacturer="TEXAS INSTRUMENTS", Author="CERN DEM JLC", Bonding=No, Component Type=Standard, ComponentHeight=1.45mm, CreateDate=25.04.2012, Device=SN74LVC1G32DBVR, HelpURL=\\cern.ch\dfs\Applications\Altium\Datasheets\SN74LVC1G32DBVR.pdf, LatestRevisionDate=25.04.2012, Manufacturer Part Number=SN74LVC1G32DBVR, Mounted=Yes, PackageDescription="SOT, 0.95mm Pitch; 5 Pin, 1.60mm W X 2.90mm L X 1.45mm H body, IPC Medium Density", Part Description="Single 2-Input Positive-OR Gate", Part Number=SN74LVC1G32DBVR, Pin Count=5, PressFit=No, Sense=No, SMD=Yes, Socket=No
IC25 IC34: "12-/16-Bit DAS with ADC, DACs, DPIOs, APIOs, Reference, Voltage Monitors, and Temp Sensor", Case=QFN40, Manufacturer=MAXIM, Manufacturer Part Number=MAX1329BETL, Author="CERN DEM HF", Bonding=No, Component Type=Standard, ComponentHeight=0.8mm, CreateDate=09.02.2022, Device=MAX1329BETL+, HelpURL=\\cern.ch\dfs\Applications\Altium\Datasheets\MAX1329BETL+.pdf, LatestRevisionDate=04.04.2022, Mounted=Yes, PackageDescription="QFN, 0.50mm Pitch, Square; 40 Pin, 6.00mm L X 6.00mm W X 0.80mm H body (w/Thermal Tab 4.25 X 4.25mm), IPC Medium Density", Part Description="12-/16-Bit DAS with ADC, DACs, DPIOs, APIOs, Reference, Voltage Monitors, and Temp Sensor", Part Number=MAX1329BETL+, Pin Count=41, PressFit=No, Sense=No, SMD=Yes, Socket=No
IC26 IC27: "Digital Temperature Sensor and Thermal Watchdog with Two-Wire Interface", Case=SSOP8, Manufacturer="TEXAS INSTRUMENTS", Author="CERN DEM JLC", Bonding=No, Component Type=Standard, ComponentHeight=1.09mm, CreateDate=15.10.2012, Device=LM75AIMM/NOPB, HelpURL=\\cern.ch\dfs\Applications\Altium\Datasheets\LM75AIMM-NOPB.pdf, LatestRevisionDate=15.10.2012, Manufacturer Part Number=LM75AIMM/NOPB, Mounted=Yes, PackageDescription="SOP, 0.65mm pitch; 8 pin,3.00mm W X 3.00mm L X 1.09mm H bodyI, PC Medium Density", Part Description="-25° to +100°C ±2°C Digital Temperature Sensor and Thermal Watchdog with Two-Wire Interface", Part Number=LM75AIMM/NOPB, Pin Count=8, PressFit=No, Sense=No, SMD=Yes, Socket=No
IC28: "0.9V To 5V, 2A, Very Low Input, Very Low Dropout, Adjustable Regulator With Enable", Case=SOIC8, Manufacturer="TEXAS INSTRUMENTS", Author="CERN DEM JLC", Bonding=No, Component Type=Standard, ComponentHeight=1.7mm, CreateDate=17.03.2014, Device=TPS7A7001DDA, HelpURL=\\cern.ch\dfs\Applications\Altium\Datasheets\TPS7A7001DDA.pdf, LatestRevisionDate=17.03.2014, Manufacturer Part Number=TPS7A7001DDA, Mounted=Yes, PackageDescription="SOIC, 1.27mm Pitch; 8 Pin, 3.90mm W X 4.90mm L X 1.70mm H body (w/Thermal Tab 2.40 X 3.10mm), IPC Medium Density", Part Description="0.9V To 5V, 2A, Very Low Input, Very Low Dropout, Adjustable Regulator with Enable", Part Number=TPS7A7001DDA, Pin Count=9, PressFit=No, Sense=No, SMD=Yes, Socket=No
IC30 IC31: "3-Terminal Regulator 1=GND 2=IN 3=OUT", Case=DPAK, Manufacturer="ST MICROELECTRONICS", Author="CERN DEM JLC", Bonding=No, Component Type=Standard, ComponentHeight=2.4mm, CreateDate=08.06.2011, Device=LD1117DT33CTR, HelpURL=\\cern.ch\dfs\Applications\Altium\Datasheets\LD1117DT33CTR.pdf, LatestRevisionDate=08.06.2011, Manufacturer Part Number=LD1117DT33CTR, Mounted=Yes, PackageDescription="TO-252 DPAK TO, 2.28mm Pitch; 2 Pin, 9.725mm L X 6.10mm W X 2.40mm H body, IPC Medium Density", Part Description="3.3V 800mA Low drop fixed and adjustable positive voltage regulators", Part Number=LD1117DT33CTR, Pin Count=3, PressFit=No, Sense=No, SMD=Yes, Socket=No
IC32 IC38: Case=TSSOP14, Manufacturer="NXP SEMICONDUCTORS", Author="CERN DEM JLC", Bonding=No, Component Type=Standard, ComponentHeight=1.1mm, CreateDate=2014-11-19, Device=74HC4066PW, HelpURL=\\cern.ch\dfs\Applications\Altium\Datasheets\74HC4066PW.pdf, LatestRevisionDate=2014-11-19, Manufacturer Part Number=74HC4066PW, Mounted=Yes, PackageDescription="SOP, 14-Leads, Body 4.4x5mm (max), Pitch 0.65mm, IPC Medium Density", Part Description="Quad Single-Pole Single-Throw Analog Switch", Part Number=74HC4066PW, Pin Count=14, PressFit=No, SMD=Yes, Socket=No, Table="Standard Logic"
IC33: "500mA Peak Output LDO Regulator", Case=SOT23-5, Manufacturer="MICROCHIP TECHNOLOGY", Author="CERN DEM WB", Bonding=No, Component Type=Standard, ComponentHeight=1.45mm, CreateDate=2019-04-16, Device=MIC5219-3.3YM5, HelpURL=\\cern.ch\dfs\Applications\Altium\Datasheets\MIC5219-3.3YM5.pdf, LatestRevisionDate=2019-04-16, Manufacturer Part Number=MIC5219-3.3YM5, Mounted=Yes, PackageDescription="SOT, 0.95mm pitch; 5 pin, 1.60mm W X 2.90mm L X 1.45mm H body, IPC Medium Density", Part Description="3.3V 500mA Peak Output Low Drop-Out  (LDO) Regulator", Part Number=MIC5219-3.3YM5, Pin Count=5, PressFit=No, Sense=No, SMD=Yes, Socket=No
IC36: "1.5A, Low Noise, Negative Linear Regulator with Precision Current Limit", Case=SON8, Manufacturer="LINEAR TECHNOLOGY", Author="CERN DEM MR", Bonding=No, Component Type=Standard, ComponentHeight=0.8mm, CreateDate=10.02.2016, Device=LT3015EDD#PBF, HelpURL=\\cern.ch\dfs\Applications\Altium\Datasheets\LT3015EDD#PBF.pdf, LatestRevisionDate=10.02.2016, Manufacturer Part Number=LT3015EDD#PBF, Mounted=Yes, PackageDescription="SON, (DFN) 0.50mm,pitch; 8 pin,3.00mm W X 3.00mm L X 0.80mm H body (w/thermal tab 1.75 X2.48mm), IPC Medium Density", Part Description="–1.22V to –29.3V, 1.5A, Low Noise, Negative Linear Regulator with Precision Current Limit", Part Number=LT3015EDD#PBF, Pin Count=9, PressFit=No, Sense=No, SMD=Yes, Socket=No
IC37: "4.5V to 60V, 1A High-Efficiency, Synchronous, Inverting Output DC-DC Converters", Case=SON12, Manufacturer=MAXIM, Author="CERN DEM HF", Bonding=No, Component Type=Standard, ComponentHeight=0.8mm, CreateDate=22.10.2021, Device=MAX17577ATC+, HelpURL=\\cern.ch\dfs\Applications\Altium\Datasheets\MAX17577ATC+.pdf, LatestRevisionDate=22.10.2021, Manufacturer Part Number=MAX17577ATC+, Mounted=Yes, PackageDescription="SON, 0.50mm Pitch, 12-Pin, 3.00mm W  X 3.00mm L X 0.80mm H body, (w/Thermal Tab 1.80 X 2.60mm), IPC Medium Density", Part Description="4.5V to 60V, 1A High-Efficiency, Synchronous, Inverting Output DC-DC Converters", Part Number=MAX17577ATC+, Pin Count=13, PressFit=No, Sense=No, SMD=Yes, Socket=No
IC39: "LinCMOS Timer", Case=SOIC8, Manufacturer="TEXAS INSTRUMENTS", Author="CERN DEM JMW", Bonding=No, Component Type=Standard, ComponentHeight=1.75mm, CreateDate=23.08.2016, Device=TLC555ID, HelpURL=\\cern.ch\dfs\Applications\Altium\Datasheets\TLC555ID.pdf, LatestRevisionDate=23.08.2016, Manufacturer Part Number=TLC555ID, Mounted=Yes, PackageDescription="SOIC 8, Pitch 1.27mm, Body 4x5mm, IPC Medium Density", Part Description="LinCMOS Timer", Part Number=TLC555ID, Pin Count=8, PressFit=No, Sense=No, SMD=Yes, Socket=No
IC40: "28V, 5A Low IQ Synchronous Step-Up Silent Switcher with PassThru", Case=QFN16, Manufacturer="ANALOG DEVICES", Author="CERN DEM HF", Bonding=No, Component Type=Standard, ComponentHeight=1.03mm, CreateDate=07.09.2022, Device=LT8337EV-1, HelpURL=\\cern.ch\dfs\Applications\Altium\Datasheets\LT8337.pdf, LatestRevisionDate=07.09.2022, Manufacturer Part Number=LT8337EV-1, Mounted=Yes, PackageDescription="LQFN, 16-Lead, 0.50mm Pitch; 3.50mm W X 3.50mm L X 0.83mm H body (with 4 Tab 0.375 X0.375mm and with a Thermal Tab 1.43 X1.43mm)# 05-08-1798", Part Description="28V, 5A Low IQ Synchronous Step-Up Silent Switcher with PassThru", Part Number=LT8337EV-1, Pin Count=21, PressFit=No, Sense=No, SMD=Yes, Socket=No
IC41 IC42: "Low Noise (3uVrms), 1A, High Voltage Low-Dropout Linear Regulator", Case=QFN20, Manufacturer="TEXAS INSTRUMENTS", Author="CERN DEM MR", Bonding=No, Component Type=Standard, ComponentHeight=1mm, CreateDate=30.06.2017, Device=TPS7A4701RGWT, HelpURL=\\cern.ch\dfs\Applications\Altium\Datasheets\TPS7A4701RGWT.pdf, LatestRevisionDate=06.07.2017, Manufacturer Part Number=TPS7A4701RGWT, Mounted=Yes, PackageDescription="QFN, 0.65mm pitch, Square; 20 Pin, 5.00mm L X 5.00mm W X 1.00mm H body (w/Thermal Tab 3.25 X 3.25mm), IPC Medium Density", Part Description="1.4V to 34V, 1A, Low Noise (4uVrms), Low-Dropout Adjustable Voltage Regulator", Part Number=TPS7A4701RGWT, Pin Count=21, PressFit=No, Sense=No, SMD=Yes, Socket=No
IC43: "1.7V-5.5V, 2K I2C™ Serial EEPROMs with EUI-48™ Node Identity", Case=SOIC8, Manufacturer="MICROCHIP TECHNOLOGY", Author="CERN DEM MR", Bonding=No, Component Type=Standard, ComponentHeight=1.75mm, CreateDate=19.07.2016, Device=24AA025E48-I/SN, HelpURL=\\cern.ch\dfs\Applications\Altium\Datasheets\24AA025E48-I-SN.pdf, LatestRevisionDate=19.07.2016, Manufacturer Part Number=24AA025E48-I/SN, Mounted=Yes, PackageDescription="SOIC 8, Pitch 1.27mm - Body 4x5mm, IPC Medium Density", Part Description="1.7V-5.5V, 2K I2C™ Serial EEPROMs with EUI-48™ Node Identity", Part Number=24AA025E48-I/SN, Pin Count=8, PressFit=No, Sense=No, SMD=Yes, Socket=No
J1: library part CMP-04767-000020-2, "CONN RCPT USB2.0 TYPE C 24POS RA", Current Rating=1.25A, Max Operating Temperature=85°C, Min Operating Temperature=-40°C, Voltage Rating=30V, Contact Material="Gold, Nickel", Gender=Receptacle, Height=9.14mm, NexarPartId=117235448, Number of Contacts=14, Schedule B=8536695050, USB Standard="USB 2.0"
J2A J2B: library part HIROSE_U.FL-R-SMT-1(10), Manufacturer="HIROSE (HRS)", Manufacturer Part Number=U.FL-R-SMT-1(10), Author="CERN DEM JLC", Component Type=Standard, ComponentHeight=1.25mm, CreateDate=24.03.2010, Family=U.FL, HelpURL=\\cern.ch\dfs\Applications\Altium\Datasheets\HIROSE_U.FL-R-SMT-1(10).pdf, LatestRevisionDate=24.03.2010, Mounted=Yes, Part Description="Up to 6GHz Ultra Small Surface Mount Male Coaxial Connectors U.FL Series", Part Number=HIROSE_U.FL-R-SMT-1(10), Pin Count=2, PressFit=No, Sense=No, SMD=Yes, Socket=No, Status=None